# EAGLE board 2D_pcb (EAGLE 9.7.0)
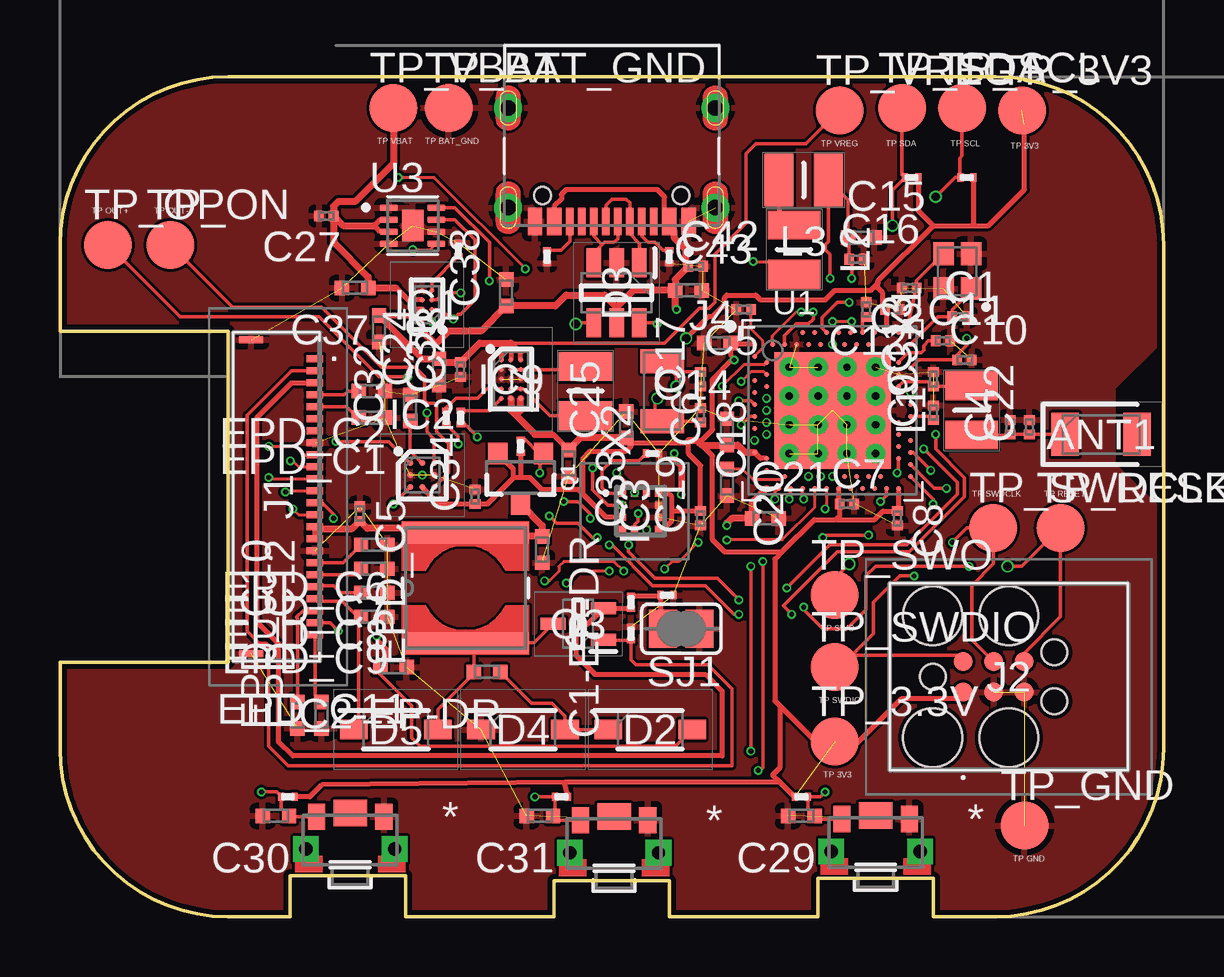
[diagram p0: board, top side]
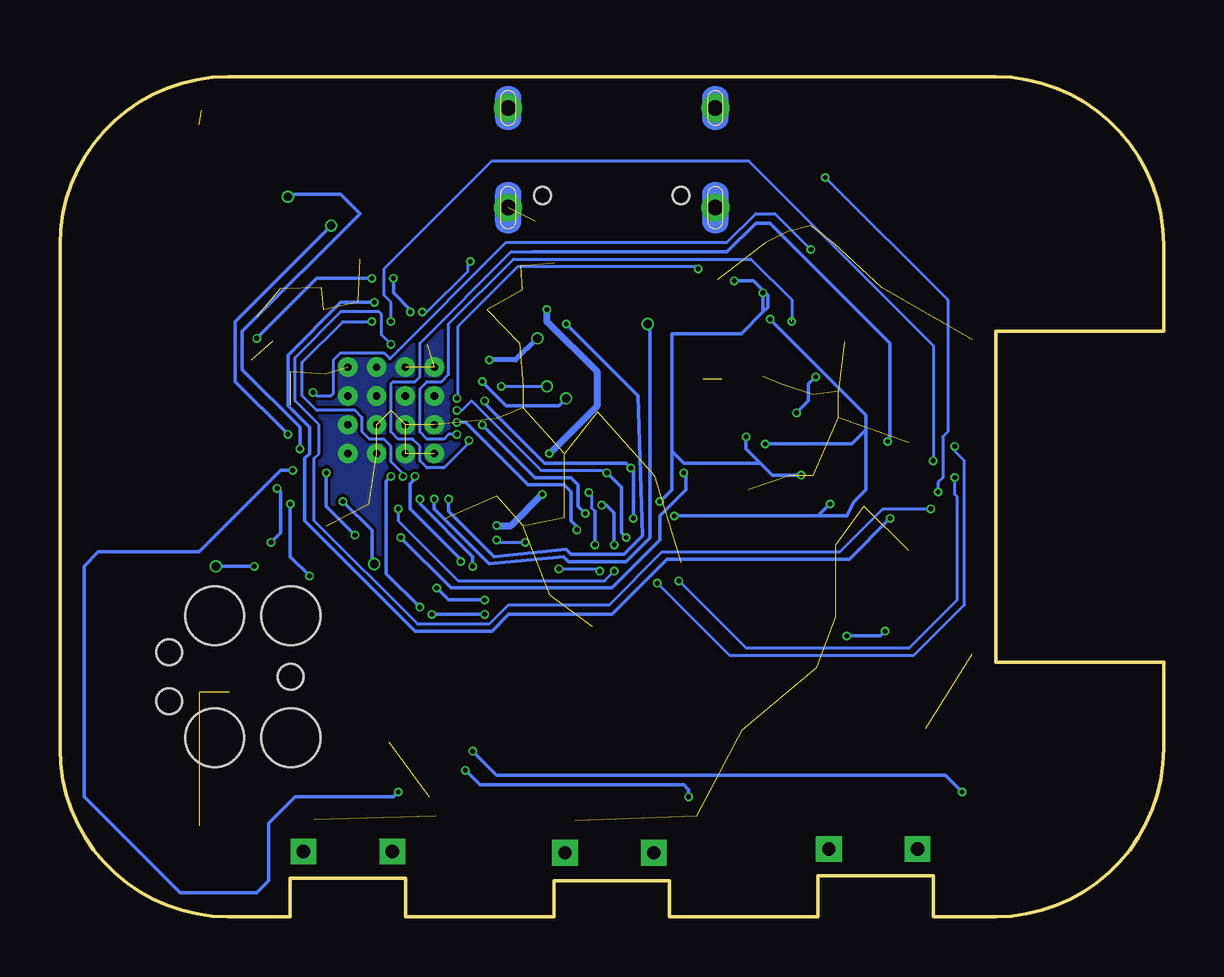
[diagram p1: board, bottom side, seen from below]

Size 46 x 35 mm. Coordinates in mm from the lower left corner, seen from the top.
Outline: 39,0 36.4,0 36.4,1.6 31.6,1.6 31.6,0 25.4,0 25.4,1.5 20.6,1.5 20.6,0 14.4,0 14.4,1.7 9.6,1.7 9.6,0 7,0 arc-90 0,7 0,10.6 7,10.6 7,24.4 0,24.4 0,28 arc-90 7,35 39,35 arc-90 46,28 46,7 arc-90 39,0
Copper layers (1+2*15+16): Top 0.035mm / dielectric 1.6mm / Route2 0.035mm / dielectric 0.15mm / Route15 0.035mm / dielectric 0.2mm / Bottom 0.035mm
Design rules "jlcpcb-2layers.dru *": minimum track width 5mil, minimum drill 0.15mm, track to track 5mil, track to pad 5mil, pad to pad 5mil, via to via 5mil, smd to smd 5mil, copper to edge 0.2mm, drill to drill 6mil, minimum pad ring 10mil, minimum via ring 3mil, stop-mask expansion 4mil, vias tented up to drill 999mm, thermal gap 10mil

## Footprints (pad centres in the part's own frame; a part is rotated, then mirrored left to right if it is on the bottom)
2450AT18B100E_ANTC3216X140N = smd 1.15 x 1.8: 1 -1.5,0; 2 1.5,0
NORDIC_NRF_3_RESC0201_N = smd 0.4 x 0.45: 1 -0.305,0; 2 0.305,0
NORDIC_NRF_3_RESC0402_N = smd 0.6 x 0.6: 1 -0.55,0; 2 0.55,0
ESP32_C6_LIBRARY_5_SOD3716X135N = smd 1.15 x 0.8: 1 -1.75,0; 2 1.75,0
ESP32_C6_LIBRARY_3_SOT95P280X145-6N = smd 1.2 x 0.6: 1 -1.25,0.95; 2 -1.25,0; 3 -1.25,-0.95; 4 1.25,-0.95; 5 1.25,0; 6 1.25,0.95
BQ25180YBGR_BGA8C40P2X4_100X155X50 = smd 0.2 x 0.2: A1 -0.2,0.6; A2 0.2,0.6; B1 -0.2,0.2; B2 0.2,0.2; C1 -0.2,-0.2; C2 0.2,-0.2; D1 -0.2,-0.6; D2 0.2,-0.6
DRV2605YZFR_BGA9C50P3X3_144X144X62 = smd 0.25 x 0.25: A1 -0.5,0.5; A2 0,0.5; A3 0.5,0.5; B1 -0.5,0; B2 0,0; B3 0.5,0; C1 -0.5,-0.5; C2 0,-0.5; C3 0.5,-0.5
BMA423_BMA423 = smd 0.3 x 0.35: 1 -0.75,-0.775; 2 -0.25,-0.775; 3 0.25,-0.775; 4 0.75,-0.775; 7 0.75,0.775; 8 0.25,0.775; 9 -0.25,0.775; 10 -0.75,0.775 | smd 0.35 x 0.3: 5 0.775,-0.25; 6 0.775,0.25; 11 -0.775,0.25; 12 -0.775,-0.25
RT6160AWSC_BGA15C40P3X5_140X230X60 = smd 0.216 x 0.216: A1 -0.4,0.8; A2 0,0.8; A3 0.4,0.8; B1 -0.4,0.4; B2 0,0.4; B3 0.4,0.4; C1 -0.4,0; C2 0,0; C3 0.4,0; D1 -0.4,-0.4; D2 0,-0.4; D3 0.4,-0.4; E1 -0.4,-0.8; E2 0,-0.8; E3 0.4,-0.8
503480-2400_5034802400 = smd 0.3 x 0.7: 1 -5.75,1.525; 2 -5.25,1.525; 3 -4.75,1.525; 4 -4.25,1.525; 5 -3.75,1.525; 6 -3.25,1.525; 7 -2.75,1.525; 8 -2.25,1.525; 9 -1.75,1.525; 10 -1.25,1.525; 11 -0.75,1.525; 12 -0.25,1.525; 13 0.25,1.525; 14 0.75,1.525; 15 1.25,1.525; 16 1.75,1.525; 17 2.25,1.525; 18 2.75,1.525; 19 3.25,1.525; 20 3.75,1.525; 21 4.25,1.525; 22 4.75,1.525; 23 5.25,1.525; 24 5.75,1.525 | smd 0.3 x 1: MP1 -6.54,-1.125; MP2 6.54,-1.125
TC2030-IDC_TC2030IDC = smd 0.783 x 0.783: 1 -0.953,-0.635; 2 -0.953,0.635; 3 0.317,-0.635; 4 0.317,0.635; 5 1.588,-0.635; 6 1.588,0.635 | hole 2.451: -2.223,-2.54; -2.223,2.54; 0.952,-2.54; 0.952,2.54 | hole 1.067: -2.223,0; 2.857,-1.016; 2.857,1.016
KH-TYPE-C-16P_KINGHELM_KH-TYPE-C-16P = smd 0.6 x 1.15: A1_B12 -3.2,4.725; A4_B9 -2.4,4.725; A9_B4 2.4,4.725; A12_B1 3.2,4.725 | smd 0.3 x 1.15: A5 -1.25,4.725; A6 -0.25,4.725; A7 0.25,4.725; A8 1.25,4.725; B5 1.75,4.725; B6 0.75,4.725; B7 -0.75,4.725; B8 -1.75,4.725 | drill 0.65 pad 1.05: SH1 -4.32,0; SH2 4.32,0; SH3 -4.32,4.15; SH4 4.32,4.15 | hole 0.7: -2.89,3.65; 2.89,3.65
MLP2016SR47MT0S1_INDC2016X100N = smd 1.2 x 2.2: 1 -1.028,0; 2 1.028,0
ESP32_C6_LIBRARY_2_IND_4828-WE-TPC_WRE = smd 0.9 x 5.3: 1 -2.286,0; 2 2.286,0
ESP32_C6_LIBRARY_4_ESP32_C6_LIBRARY_4_ESP32_C6_LIBRARY_4_ESP32_C6_LIBRARY_4_ESP32_WROVER_SPARKFUN-DISCRETESEMI_SOT23-3 = smd 0.8 x 0.9: 1 -0.95,-1; 2 0.95,-1; 3 0,1.1
ESP32_C6_LIBRARY_6_SOT65P210X110-3N = smd 1.05 x 0.5: 1 -1.05,0.65; 2 -1.05,-0.65; 3 1.05,0
CPF0201D7K68C1_0201 = smd 0.35 x 0.25: 1 0,0.275; 2 0,-0.275
ESP32_C6_LIBRARY_7_JUMPER_SJ = smd 1.168 x 1.6: 1 -0.762,0; 2 0.762,0
2025-10-22_07-23-44_LIBRARY_SW_EVP-AKE31A_PAN = smd 0.711 x 1.092: 1 -1.4,-0.972; 2 1.4,-0.972 | drill 0.559 pad 0.914 square: 3 -1.848,0.381; 4 1.848,0.381 | smd 1.397 x 1.092: 5 0,-1.124
HECTOR_WATCH_1_TP20R = smd 2 x 2: TP 0,0
NORDIC_NRF_4_AQFN50P700X700X85_HS-74N = smd 4.85 x 4.85: P$74 0,0 | drill 0.3 pad 0.6: P$75 -1.8,1.8; P$76 -0.6,1.8; P$77 0.6,1.8; P$78 1.8,1.8; P$79 -1.8,0.6; P$80 -0.6,0.6; P$81 0.6,0.6; P$82 1.8,0.6; P$83 -1.8,-0.6; P$84 -0.6,-0.6; P$85 0.6,-0.6; P$86 1.8,-0.6; P$87 -1.8,-1.8; P$88 -0.6,-1.8; P$89 0.6,-1.8; P$90 1.8,-1.8 | smd 0.2 x 0.2: P$A8 -1.25,3.25; P$A10 -0.75,3.25; P$A12 -0.25,3.25; P$A14 0.25,3.25; P$A16 0.75,3.25; P$A18 1.25,3.25; P$A20 1.75,3.25; P$A22 2.25,3.25; P$A23 2.75,3.25; P$AA24 3.25,-2.25; P$AB2 -2.75,-2.5; P$AC5 -2,-2.75; P$AC9 -1,-2.75; P$AC11 -0.5,-2.75; P$AC13 0,-2.75; P$AC15 0.5,-2.75; P$AC17 1,-2.75; P$AC19 1.5,-2.75; P$AC21 2,-2.75; P$AC24 3.25,-2.75; P$AD2 -2.75,-3.25; P$AD4 -2.25,-3.25; P$AD6 -1.75,-3.25; P$AD8 -1.25,-3.25; P$AD10 -0.75,-3.25; P$AD12 -0.25,-3.25; P$AD14 0.25,-3.25; P$AD16 0.75,-3.25; P$AD18 1.25,-3.25; P$AD20 1.75,-3.25; P$AD22 2.25,-3.25; P$AD23 2.75,-3.25; P$B1 -3.25,2.75; P$B3 -2.5,2.75; P$B5 -2,2.75; P$B7 -1.5,2.75; P$B9 -1,2.75; P$B11 -0.5,2.75; P$B13 0,2.75; P$B15 0.5,2.75; P$B17 1,2.75; P$B19 1.5,2.75; P$B24 3.25,2.75; P$C1 -3.25,2.25; P$D2 -2.75,2; P$D23 2.75,2; P$E24 3.25,1.75; P$F2 -2.75,1.5; P$F23 2.75,1.5; P$G1 -3.25,1.25; P$H2 -2.75,1; P$H23 2.75,1; P$J1 -3.25,0.75; P$J24 3.25,0.75; P$K2 -2.75,0.5; P$L1 -3.25,0.25; P$L24 3.25,0.25; P$M2 -2.75,0; P$N1 -3.25,-0.25; P$N24 3.25,-0.25; P$P2 -2.75,-0.5; P$P23 2.75,-0.5; P$R1 -3.25,-0.75; P$R24 3.25,-0.75; P$T2 -2.75,-1; P$T23 2.75,-1; P$U1 -3.25,-1.25; P$U24 3.25,-1.25; P$V23 2.75,-1.5; P$W1 -3.25,-1.75; P$W24 3.25,-1.75; P$Y2 -2.75,-2; P$Y23 2.75,-2
ESP32_C6_LIBRARY_SON50P200X200X80-9N = smd 0.76 x 0.27: 1 -0.985,0.75; 2 -0.985,0.25; 3 -0.985,-0.25; 4 -0.985,-0.75; 5 0.985,-0.75; 6 0.985,-0.25; 7 0.985,0.25; 8 0.985,0.75 | smd 0.9 x 1.3: 9 0,0
NORDIC_NRF_BT-XTAL_2016_N = smd 0.95 x 0.85: 1 -0.725,-0.575; 2 0.725,-0.575; 3 0.725,0.575; 4 -0.725,0.575
NORDIC_NRF_1_XTAL_3215_N = smd 1 x 1.8: 1 -1.25,0; 2 1.25,0

## Placement (x,y rotation side)
ANT1  2450AT18B100E  [2450AT18B100E_ANTC3216X140N]  43.4,20.1 0 top
C1  12pF  [NORDIC_NRF_3_RESC0201_N]  37.5,25 0 top
C1-EP-DR  10uF  [NORDIC_NRF_3_RESC0402_N]  20.1,15.3 270 top
C2  12pF  [NORDIC_NRF_3_RESC0201_N]  35.4,26.2 180 top
C2-EP-DR  4.7uF  [NORDIC_NRF_3_RESC0402_N]  17.8,10.2 180 top
C3  1pF  [NORDIC_NRF_3_RESC0201_N]  36.4,22.4 90 top
C4  1pF  [NORDIC_NRF_3_RESC0201_N]  39.6,20.4 90 top
C5  100nF  [NORDIC_NRF_3_RESC0201_N]  28.5,25.3 180 top
C6  4.7uF  [NORDIC_NRF_3_RESC0402_N]  27.8,20.2 90 top
C7  100nF  [NORDIC_NRF_3_RESC0201_N]  32.8,17.2 0 top
C8  100nF  [NORDIC_NRF_3_RESC0201_N]  34.9,16.6 270 top
C9  820pF N.C.  [NORDIC_NRF_3_RESC0201_N]  36.4,21 90 top
C10  N.C.  [NORDIC_NRF_3_RESC0201_N]  37.7,23.2 0 top
C11  100pF  [NORDIC_NRF_3_RESC0201_N]  36.8,24 0 top
C12  100nF  [NORDIC_NRF_3_RESC0201_N]  34.7,25.3 180 top
C13  N.C.  [NORDIC_NRF_3_RESC0201_N]  33.6,25.3 270 top
C14  4.7uF  [NORDIC_NRF_3_RESC0402_N]  27.4,23.9 180 top
C15  1.0uF  [NORDIC_NRF_3_RESC0402_N]  33.4,28.3 0 top
C16  47nF  [NORDIC_NRF_3_RESC0201_N]  33.2,27.4 0 top
C17  12pF  [NORDIC_NRF_3_RESC0201_N]  26.7,22.4 90 top
C18  12pF  [NORDIC_NRF_3_RESC0201_N]  26.7,20.9 270 top
C19  100nF  [NORDIC_NRF_3_RESC0201_N]  26.7,16.6 90 top
C20  4.7uF  [NORDIC_NRF_3_RESC0402_N]  27.8,18.1 270 top
C21  4.7uF  [NORDIC_NRF_3_RESC0402_N]  29.4,16.6 0 top
C22  N.C.  [NORDIC_NRF_3_RESC0201_N]  40.4,20.4 90 top
C23  0.1uF  [NORDIC_NRF_3_RESC0201_N]  16.7,22.8 90 top
C24  10uF  [NORDIC_NRF_3_RESC0402_N]  15.8,22.7 90 top
C25  22uF  [NORDIC_NRF_3_RESC0402_N]  23.6,20.5 90 top
C27  0.1uF  [NORDIC_NRF_3_RESC0201_N]  11.1,29.2 180 top
C29  1uF  [NORDIC_NRF_3_RESC0402_N]  30.9,4.2 180 top
C30  1uF  [NORDIC_NRF_3_RESC0402_N]  9,4.2 180 top
C31  1uF  [NORDIC_NRF_3_RESC0402_N]  20,4.2 180 top
C32  1uF  [NORDIC_NRF_3_RESC0402_N]  14.6,21.2 90 top
C33  22uF  [NORDIC_NRF_3_RESC0402_N]  21.2,18.9 270 top
C34  0.1uF  [NORDIC_NRF_3_RESC0201_N]  17.3,17.5 90 top
C37  1uF  [NORDIC_NRF_3_RESC0402_N]  12.3,26.2 180 top
C38  1uF  [NORDIC_NRF_3_RESC0402_N]  18.6,26 90 top
C39  10uF  [NORDIC_NRF_3_RESC0402_N]  13.3,24.5 270 top
C42  0.1uF  [NORDIC_NRF_3_RESC0201_N]  26.5,27.1 0 top
C43  4.7uF  [NORDIC_NRF_3_RESC0402_N]  26.2,26.1 0 top
D2  MBR0530  [ESP32_C6_LIBRARY_5_SOD3716X135N]  24.6,7.8 0 top
D3  USBLC6-2SC6Y  [ESP32_C6_LIBRARY_3_SOT95P280X145-6N]  23.2,26 270 top
D4  MBR0530  [ESP32_C6_LIBRARY_5_SOD3716X135N]  19.3,7.8 0 top
D5  MBR0530  [ESP32_C6_LIBRARY_5_SOD3716X135N]  14,7.8 0 top
EPD_C1  1uF  [NORDIC_NRF_3_RESC0402_N]  13,20.8 180 top
EPD_C2  1uF  [NORDIC_NRF_3_RESC0402_N]  13,21.9 180 top
EPD_C5  0.1uF  [NORDIC_NRF_3_RESC0201_N]  12.5,16.8 270 top
EPD_C6  1uF  [NORDIC_NRF_3_RESC0402_N]  13.1,15.5 180 top
EPD_C7  1uF  [NORDIC_NRF_3_RESC0402_N]  13.1,14.5 180 top
EPD_C8  1uF  [NORDIC_NRF_3_RESC0402_N]  13.1,13.5 180 top
EPD_C9  1uF  [NORDIC_NRF_3_RESC0402_N]  13.1,12.5 180 top
EPD_C10  1uF  [NORDIC_NRF_3_RESC0402_N]  9.9,8.4 90 top
EPD_C11  1uF  [NORDIC_NRF_3_RESC0402_N]  13.9,10.4 180 top
EPD_C12  1uF  [NORDIC_NRF_3_RESC0402_N]  10.9,8.4 90 top
IC1  BQ25180YBGR  [BQ25180YBGR_BGA8C40P2X4_100X155X50]  15.3,25.5 180 top
IC2  DRV2605YZFR  [DRV2605YZFR_BGA9C50P3X3_144X144X62]  15.1,18.4 0 top
IC3  BMA423  [BMA423_BMA423]  24.2,16.9 270 top
IC9  RT6160AWSC  [RT6160AWSC_BGA15C40P3X5_140X230X60]  18.8,22.4 0 top
J1  503480-2400  [503480-2400_5034802400]  9.1,17.5 270 top
J2  TC2030-IDC  [TC2030-IDC_TC2030IDC]  38.6,10 0 top
J4  KH-TYPE-C-16P  [KH-TYPE-C-16P_KINGHELM_KH-TYPE-C-16P]  23,33.7 180 top
L1  3.9nH  [MLP2016SR47MT0S1_INDC2016X100N]  38,21.1 270 top
L2  10uH  [MLP2016SR47MT0S1_INDC2016X100N]  30.6,27.8 90 top
L3  15nH  [MLP2016SR47MT0S1_INDC2016X100N]  31,30.7 0 top
L5  68uH  [ESP32_C6_LIBRARY_2_IND_4828-WE-TPC_WRE]  16.9,13.7 90 top
L7  FTC252012SR47MBCA  [MLP2016SR47MT0S1_INDC2016X100N]  21.9,21.9 270 top
Q1  20V/4.2A/52mΩ/1.4W  [ESP32_C6_LIBRARY_4_ESP32_C6_LIBRARY_4_ESP32_C6_LIBRARY_4_ESP32_C6_LIBRARY_4_ESP32_WROVER_SPARKFUN-DISCRETESEMI_SOT23-3]  19.2,18.3 180 top
Q3  SI1308EDL-T1-GE3  [ESP32_C6_LIBRARY_6_SOT65P210X110-3N]  21.6,12.2 180 top
R1_EP_DR  0.47  [CPF0201D7K68C1_0201]  23.8,13.1 0 top
R1_USB  5K1  [CPF0201D7K68C1_0201]  25.4,27.5 0 top
R2  0  [CPF0201D7K68C1_0201]  16.7,20.8 0 top
R2_EP_DR  10K  [CPF0201D7K68C1_0201]  23.8,11.8 0 top
R2_USB  5K1  [CPF0201D7K68C1_0201]  20.3,27.5 0 top
R3  0  [CPF0201D7K68C1_0201]  24.7,19.3 90 top
R4  0  [CPF0201D7K68C1_0201]  16.1,20.8 0 top
R5  10K  [CPF0201D7K68C1_0201]  9.5,5 90 top
R7  10K  [CPF0201D7K68C1_0201]  30.9,5 270 top
R8  10K  [CPF0201D7K68C1_0201]  20.9,5 90 top
R9  10K  [CPF0201D7K68C1_0201]  16.6,27.8 0 top
R17  3K3  [CPF0201D7K68C1_0201]  37.8,30.8 270 top
R18  3K3  [CPF0201D7K68C1_0201]  35.5,30.8 270 top
R_PWR_EPD  10K  [CPF0201D7K68C1_0201]  19.2,19.6 0 top
R_TYPE_SEL  2.2  [CPF0201D7K68C1_0201]  25.3,13.4 270 top
SJ1  [ESP32_C6_LIBRARY_7_JUMPER_SJ]  25.9,12 180 top
SW2  0  [2025-10-22_07-23-44_LIBRARY_SW_EVP-AKE31A_PAN]  34,3.1 180 top
SW3  0  [2025-10-22_07-23-44_LIBRARY_SW_EVP-AKE31A_PAN]  23.1,3.05 180 top
SW4  0  [2025-10-22_07-23-44_LIBRARY_SW_EVP-AKE31A_PAN]  12.1,3.2 180 top
TP_3.3V  HECTOR_WATCH_1_TPTP20R  [HECTOR_WATCH_1_TP20R]  32.3,7.3 0 top
TP_3V3  HECTOR_WATCH_1_TPTP20R  [HECTOR_WATCH_1_TP20R]  40.1,33.6 0 top
TP_BAT_GND  HECTOR_WATCH_1_TPTP20R  [HECTOR_WATCH_1_TP20R]  16.2,33.7 0 top
TP_GND  HECTOR_WATCH_1_TPTP20R  [HECTOR_WATCH_1_TP20R]  40.2,3.8 0 top
TP_ON  HECTOR_WATCH_1_TPTP20R  [HECTOR_WATCH_1_TP20R]  4.6,28 0 top
TP_OP  HECTOR_WATCH_1_TPTP20R  [HECTOR_WATCH_1_TP20R]  2,28 0 top
TP_RESET  HECTOR_WATCH_1_TPTP20R  [HECTOR_WATCH_1_TP20R]  41.7,16.2 0 top
TP_SCL  HECTOR_WATCH_1_TPTP20R  [HECTOR_WATCH_1_TP20R]  37.6,33.7 0 top
TP_SDA  HECTOR_WATCH_1_TPTP20R  [HECTOR_WATCH_1_TP20R]  35.1,33.7 0 top
TP_SWDCLK  HECTOR_WATCH_1_TPTP20R  [HECTOR_WATCH_1_TP20R]  38.9,16.2 0 top
TP_SWDIO  HECTOR_WATCH_1_TPTP20R  [HECTOR_WATCH_1_TP20R]  32.3,10.4 0 top
TP_SWO  HECTOR_WATCH_1_TPTP20R  [HECTOR_WATCH_1_TP20R]  32.3,13.4 0 top
TP_VBAT  HECTOR_WATCH_1_TPTP20R  [HECTOR_WATCH_1_TP20R]  13.9,33.7 0 top
TP_VREG  HECTOR_WATCH_1_TPTP20R  [HECTOR_WATCH_1_TP20R]  32.5,33.6 0 top
U1  NRF52840_QF  [NORDIC_NRF_4_AQFN50P700X700X85_HS-74N]  32.2,21.1 0 top
U3  MAX17048G+T10  [ESP32_C6_LIBRARY_SON50P200X200X80-9N]  14.7,28.8 0 top
X1  32MHz  [NORDIC_NRF_BT-XTAL_2016_N]  37.4,26.9 90 top
X2  32.768kHz  [NORDIC_NRF_1_XTAL_3215_N]  25.1,21.9 90 top

## Library data of the parts
ANT1 = InkTime_v5; ARROW_PART_NUMBER: 2450AT18B100E; ARROW_PRICE-STOCK: https://www.arrow.com/en/products/2450at18b100e/johanson-dielectrics?utm_currency=USD&region=nac; DESCRIPTION: Antennas 2.45GHz ANTENNA; HEIGHT: 1.4mm; MANUFACTURER_NAME: JOHANSON TECHNOLOGY; MANUFACTURER_PART_NUMBER: 2450AT18B100E; MOUSER_PART_NUMBER: 609-2450AT18B100E; MOUSER_PRICE-STOCK: https://www.mouser.co.uk/ProductDetail/Johanson-Technology/2450AT18B100E?qs=yCnrNFeXz%252Bh5MFsFIXGZGA%3D%3D
C1 C1-EP-DR C2 C2-EP-DR C3-C25 C27 C29-C34 C37-C39 C42 C43 EPD_C1 EPD_C2 EPD_C5-EPD_C12 R1_EP_DR R1_USB R2 R2_EP_DR R2_USB R3-R5 R7-R9 R17 R18 R_PWR_EPD R_TYPE_SEL SJ1 TP_3.3V TP_3V3 TP_BAT_GND TP_GND TP_ON TP_OP TP_RESET TP_SCL TP_SDA TP_SWDCLK TP_SWDIO TP_SWO TP_VBAT TP_VREG U1 X1 X2 = InkTime_v5
D2 D4 D5 = InkTime_v5; AVAILABILITY: In Stock; CHECK_PRICES: https://www.snapeda.com/parts/MBR0530/Onsemi/view-part/?ref=eda; DESCRIPTION: Diode Schottky 30 V 500mA Surface Mount SOD-123; MF: ON Semiconductor; MP: MBR0530; PACKAGE: SOD-123-2 ON Semiconductor; PRICE: None; PURCHASE-URL: https://www.snapeda.com/api/url_track_click_mouser/?unipart_id=179458&manufacturer=ON Semiconductor&part_name=MBR0530&search_term=None; SNAPEDA_LINK: https://www.snapeda.com/parts/MBR0530/Onsemi/view-part/?ref=snap
D3 = InkTime_v5; AVAILABILITY: In Stock; CHECK_PRICES: https://www.snapeda.com/parts/USBLC6-2SC6Y/STMicroelectronics/view-part/?ref=eda; DESCRIPTION: 17V Clamp 5A (8/20µs) Ipp Tvs Diode Surface Mount SOT-23-6; MF: STMicroelectronics; MP: USBLC6-2SC6Y; PACKAGE: SOT-23-6 STMicroelectronics; PRICE: None; SNAPEDA_LINK: https://www.snapeda.com/parts/USBLC6-2SC6Y/STMicroelectronics/view-part/?ref=snap
IC1 = InkTime_v5; ARROW_PART_NUMBER: BQ25180YBGR; ARROW_PRICE-STOCK: https://www.arrow.com/en/products/bq25180ybgr/texas-instruments?utm_currency=USD&region=nac; DESCRIPTION: Charger IC Lithium Ion/Polymer, Lithium Iron Phosphate 8-DSBGA (1.6x1.1); HEIGHT: 0.5mm; MANUFACTURER_NAME: Texas Instruments; MANUFACTURER_PART_NUMBER: BQ25180YBGR; MOUSER_PART_NUMBER: 595-BQ25180YBGR; MOUSER_PRICE-STOCK: https://www.mouser.co.uk/ProductDetail/Texas-Instruments/BQ25180YBGR?qs=doiCPypUmgEWjAK%252BJAX6Tw%3D%3D
IC2 = InkTime_v5; ARROW_PART_NUMBER: DRV2605YZFR; ARROW_PRICE-STOCK: https://www.arrow.com/en/products/drv2605yzfr/texas-instruments?region=nac; DESCRIPTION: Haptic Driver for ERM/LRA with Built-In Library and Smart Loop Architecture; HEIGHT: 0.625mm; MANUFACTURER_NAME: Texas Instruments; MANUFACTURER_PART_NUMBER: DRV2605YZFR
IC3 = InkTime_v5; ARROW_PART_NUMBER: BMA423; ARROW_PRICE-STOCK: https://www.arrow.com/en/products/bma423/bosch; DESCRIPTION: Accelerometers Triaxial low-g 12bit Acceleration Sensor; HEIGHT: 1mm; MANUFACTURER_NAME: BOSCH; MANUFACTURER_PART_NUMBER: BMA423; MOUSER_PART_NUMBER: 262-BMA423; MOUSER_PRICE-STOCK: https://www.mouser.co.uk/ProductDetail/Bosch-Sensortec/BMA423?qs=HXFqYaX1Q2xC%252BSgeGoX3mg%3D%3D
IC9 = InkTime_v5; DESCRIPTION: Buck-Boost Regulator Positive Output Step-Up/Step-Down I2C DC-DC Controller IC 15-WL-CSP (BSC) (1.4x2.3); HEIGHT: 0.6mm; MANUFACTURER_NAME: RICHTEK; MANUFACTURER_PART_NUMBER: RT6160AWSC; MOUSER_PART_NUMBER: 835-RT6160AWSC; MOUSER_PRICE-STOCK: https://www.mouser.co.uk/ProductDetail/Richtek/RT6160AWSC?qs=amGC7iS6iy%2FLd9PSoixZXQ%3D%3D
J1 = InkTime_v5; DESCRIPTION: FFC & FPC Connectors 0.5mm FPC RA SMT Dual Contact 24Ckt; HEIGHT: 1.87mm; MANUFACTURER_NAME: Molex; MANUFACTURER_PART_NUMBER: 503480-2400; MOUSER_PART_NUMBER: 538-503480-2400; MOUSER_PRICE-STOCK: https://www.mouser.co.uk/ProductDetail/Molex/503480-2400?qs=OAhjpuo3Vu7efIoxFh9AOw%3D%3D
J2 = InkTime_v5; DESCRIPTION: CABLE ADAPTER 6 POS; HEIGHT: 19mm; MANUFACTURER_NAME: Tag Connect; MANUFACTURER_PART_NUMBER: TC2030-IDC
J4 = InkTime_v5; AVAILABILITY: Not in stock; CHECK_PRICES: https://www.snapeda.com/parts/KH-TYPE-C-16P/Kinghelm/view-part/?ref=eda; MF: kinghelm; MP: KH-TYPE-C-16P; PACKAGE: None; PRICE: None; SNAPEDA_LINK: https://www.snapeda.com/parts/KH-TYPE-C-16P/Kinghelm/view-part/?ref=snap
L1-L3 L7 = InkTime_v5; DESCRIPTION: SMD / SMT Inductors (Coils), L=0.47?H, L x W x T :; HEIGHT: 1mm; JLCPCB: https://jlcpcb.com/partdetail/6763488-FTC252012SR47MBCA/C5832368; MANUFACTURER_NAME: TDK; MANUFACTURER_PART_NUMBER: FTC252012SR47MBCA
L5 = InkTime_v5; COPYRIGHT: Copyright (C) 2024 Ultra Librarian. All rights reserved.; MANUFACTURER_PART_NUMBER: 744043680; MFR_NAME: Wurth Electronics
Q1 = InkTime_v5; PROD_ID: TRAN-14388
Q3 = InkTime_v5; AVAILABILITY: In Stock; CHECK_PRICES: https://www.snapeda.com/parts/SI1308EDL-T1-GE3/Vishay+Siliconix/view-part/?ref=eda; DESCRIPTION: Si1308EDL-T1-GE3 N-channel MOSFET Transistor, 1.5 A, 30 V, 3-Pin SC-70 | Siliconix / Vishay SI1308EDL-T1-GE3; MF: Vishay Siliconix; MP: SI1308EDL-T1-GE3; PACKAGE: SOT-323 Vishay Semiconductor; PRICE: None; PURCHASE-URL: https://www.snapeda.com/api/url_track_click_mouser/?unipart_id=274603&manufacturer=Vishay Siliconix&part_name=SI1308EDL-T1-GE3&search_term=None; SNAPEDA_LINK: https://www.snapeda.com/parts/SI1308EDL-T1-GE3/Vishay+Siliconix/view-part/?ref=snap
SW2-SW4 = InkTime_v5; COPYRIGHT: Copyright (C) 2025 Ultra Librarian. All rights reserved.; DIGI-KEY_PART_NUMBER_1: P123437TR-ND; DIGI-KEY_PART_NUMBER_2: P123437CT-ND; DIGI-KEY_PART_NUMBER_3: P123437DKR-ND; MANUFACTURER_NAME: Panasonic; MANUFACTURER_PART_NUMBER: EVP-AKE31A
U3 = InkTime_v5; AVAILABILITY: In Stock; CHECK_PRICES: https://www.snapeda.com/parts/MAX17048G+T10/Analog+Devices/view-part/?ref=eda; DESCRIPTION: 3µA 1-Cell/2-Cell Fuel Gauge with ModelGauge; MF: Analog Devices; MP: MAX17048G+T10; PACKAGE: TDFN-8 Maxim; PRICE: None; PURCHASE-URL: https://www.snapeda.com/api/url_track_click_mouser/?unipart_id=329239&manufacturer=Analog Devices&part_name=MAX17048G+T10&search_term=None; SNAPEDA_LINK: https://www.snapeda.com/parts/MAX17048G+T10/Analog+Devices/view-part/?ref=snap

## Nets
3V3: C6.1 C7.1 C8.1 C12.2 C14.1 C19.2 C25.1 C33.1 C34.1 IC2.C2 IC3.3 IC3.7 IC3.10 IC9.E2 IC9.E3 J2.1 Q1.2 R5.2 R7.2 R8.2 R17.1 R18.1 R_PWR_EPD.2 TP_3.3V.TP TP_3V3.TP U1.P$A22 U1.P$AD14 U1.P$AD23 U1.P$B1 U1.P$W1 U1.P$Y2
ALERT: U1.P$J24 U3.5
D+: D3.4 U1.P$AD6
D-: D3.6 U1.P$AD4
DEC1: C5.1 U1.P$C1
DEC3: C11.1 U1.P$D23
DEC4_6: C10.1 C15.1 C16.1 L3.2 U1.P$B5 U1.P$E24
DN: D3.1 J4.A7 J4.B7
DP: D3.3 J4.A6 J4.B6
EPD_3V3: C1-EP-DR.1 EPD_C5.2 J1.15 J1.16 L5.2 Q1.3
EPD_BUSY: J1.9 U1.P$AD12
EPD_CS: J1.12 U1.P$K2
EPD_DC: J1.11 U1.P$AD10
EPD_RST: J1.10 U1.P$AC11
GDR: J1.2 Q3.1 R2_EP_DR.2
GND: C1-EP-DR.2 C1.2 C2.2 C3.2 C4.2 C5.2 C6.2 C7.2 C8.2 C9.2 C10.2 C11.2 C12.1 C13.1 C14.2 C15.2 C16.2 C17.1 C18.1 C19.1 C20.2 C21.2 C22.2 C23.1 C24.1 C25.2 C27.2 C29.2 C30.2 C31.2 C32.2 C33.2 C34.2 C37.2 C38.2 C39.2 C42.2 C43.2 D3.2 D4.1 EPD_C1.1 EPD_C2.1 EPD_C5.1 EPD_C6.1 EPD_C7.1 EPD_C8.1 EPD_C9.1 EPD_C10.1 EPD_C11.1 EPD_C12.1 IC1.D2 IC2.B1 IC2.B3 IC3.8 IC3.9 IC9.B1 IC9.C1 IC9.C2 IC9.C3 J1.8 J1.17 J1.MP1 J1.MP2 J2.3 J2.5 J4.A1_B12 J4.A12_B1 J4.SH1 J4.SH2 J4.SH3 J4.SH4 R1_USB.2 R2_EP_DR.1 R2_USB.2 R3.2 R9.1 R_TYPE_SEL.1 SJ1.1 SW2.1 SW3.1 SW4.1 TP_BAT_GND.TP TP_GND.TP U1.P$74 U1.P$75 U1.P$76 U1.P$77 U1.P$78 U1.P$79 U1.P$80 U1.P$81 U1.P$82 U1.P$83 U1.P$84 U1.P$85 U1.P$86 U1.P$87 U1.P$88 U1.P$89 U1.P$90 U1.P$B7 U1.P$F23 U3.1 U3.4 U3.6 U3.9 X1.2 X1.4
HAPTIC_EN: IC2.A1 U1.P$U1
IMU_INT1: IC3.5 U1.P$N1
IMU_INT2: IC3.6 U1.P$P2
LX1: IC9.B2 IC9.B3 L7.1
LX2: IC9.D2 IC9.D3 L7.2
MOSI: J1.14 U1.P$B13
N$1: IC1.D1 R9.2
N$2: IC9.D1 R4.1
N$3: IC9.E1 R2.1
N$4: IC3.1 R3.1
N$5: C20.1 U1.P$AC5
N$6: L2.1 U1.P$B3
N$7: L2.2 L3.1
N$8: C13.2 U1.P$A18
N$9: C2.1 U1.P$A23 X1.3
N$10: C1.1 U1.P$B24 X1.1
N$11: C3.1 L1.1 U1.P$H23
N$12: C9.1 U1.P$N24
N$13: C2-EP-DR.1 D2.1 D4.2
N$14: C2-EP-DR.2 D5.2 L5.1 Q3.3
N$15: R1_EP_DR.1 R_TYPE_SEL.2 SJ1.2
N$16: EPD_C1.2 J1.5
N$17: EPD_C2.2 J1.4
N$18: EPD_C6.2 J1.18
N$19: EPD_C7.2 J1.19
N$20: EPD_C8.2 J1.20
N$21: C32.1 IC2.A2
N$22: EPD_C10.2 J1.22
N$23: J4.B5 R2_USB.1
N$24: EPD_C12.2 J1.24
N$25: J4.A5 R1_USB.1
OUT+: IC2.A3 TP_OP.TP
OUT-: IC2.C3 TP_ON.TP
P0.00: C17.2 U1.P$D2 X2.2
P0.01: C18.2 U1.P$F2 X2.1
P0.04: U1.P$J1
P0.09: U1.P$L24
P0.13: C30.1 R5.1 SW4.2 U1.P$AD8
P0.14: C31.1 R8.1 SW3.2 U1.P$AC9
P0.19: U1.P$AC15
P0.20: U1.P$AD16
P0.21: U1.P$AC17
P0.22: U1.P$AD18
P0.23: U1.P$AC19
P0.24: U1.P$AD20
P0.25: U1.P$AC21
P0.26: U1.P$G1
P0.27: U1.P$H2
P0.28: U1.P$B11
P0.29: U1.P$A10
P0.30: U1.P$B9
P0.31: U1.P$A8
P1.01: Q1.1 R_PWR_EPD.1 U1.P$Y23
P1.02: C29.1 R7.1 SW2.2 U1.P$W24
P1.03: U1.P$V23
P1.04: U1.P$U24
P1.05: U1.P$T23
P1.06: U1.P$R24
P1.07: U1.P$P23
P1.09: U1.P$R1
P1.10: U1.P$A20
P1.11: U1.P$B19
P1.12: U1.P$B17
P1.13: U1.P$A16
P1.14: U1.P$B15
P1.15: U1.P$A14
PMIC_INT: IC1.A1 U1.P$T2
PREVGH: D5.1 EPD_C9.2 J1.21
PREVGL: D2.2 EPD_C11.2 J1.23
RESE: J1.3 Q3.2 R1_EP_DR.2
RESET: J2.6 TP_RESET.TP U1.P$AC13
RF: ANT1.1 C4.1 C22.1 L1.2
SCK: J1.13 U1.P$A12
SCL: IC1.B1 IC2.C1 IC3.12 R4.2 R17.2 TP_SCL.TP U1.P$M2 U3.7
SDA: IC1.C1 IC2.B2 IC3.2 R2.2 R18.2 TP_SDA.TP U1.P$L1 U3.8
SWDCLK: J2.4 TP_SWDCLK.TP U1.P$AA24
SWDIO: J2.2 TP_SWDIO.TP U1.P$AC24
SWO: TP_SWO.TP U1.P$AD22
VBAT: C27.1 C37.1 IC1.C2 TP_VBAT.TP U3.2 U3.3
VBUS: C21.1 C38.1 C42.1 C43.1 D3.5 IC1.A2 J4.A4_B9 J4.A9_B4 U1.P$AD2
VREG: C23.2 C24.2 C39.1 IC1.B2 IC9.A1 IC9.A2 IC9.A3 TP_VREG.TP

## Tracks (layer width: path | path; a pad name or v marks a point on that pad's centre or on a via)
3V3  (via drill 0.2, 0.35)  (2 unrouted)
  Top 0.2: C33.1 20.55,20.1 20.5,20.1 | U1.P$Y2 29.2,19.1 U1.P$W1 | 32.39,16.59 32.39,16.55 33.95,16.55 34.3,16.91 C8.1 34.95,16.95 U1.P$AD23 | 32.39,16.59 32.49,16.7 C7.1 32.45,17.26 U1.P$AD14 | 32.39,16.59 32.35,16.55 31.45,16.55 30.1,15.2 | 30.1,15.2 29.8,14.9 29.8,9 30,8.8 | 30.1,15.2 27.7,15.2 27.2,15.7 27.2,19.2 26.75,19.65 | U1.P$B1 27.91,23.85 C14.1 27.95,23.41 v28.1,23.2 28,23.2 27.2,22.4 27.2,20.3 26.65,19.75 | v26.1,24.1 27,25 27.2,25 27.7,25.5 27.7,25.8 27.8,25.9 29,25.9 29.2,25.7 31.9,25.7 32.3,26.1 33.8,26.1 34.1,26.4 | U1.P$A22 34.45,25.25 C12.2 34.3,25.39 34.3,26 34.1,26.2 34.1,26.4 | 34.1,26.4 34.1,26.5 36.4,28.8 | 36.4,28.8 38,28.8 | 38,28.8 38.7,28.8 40.2,30.3 40.2,33 | R17.1 38.08,28.88 38,28.8 | R18.1 35.77,29.43 36.4,28.8 | 26.2,19.85 26.2,19.75 26.2,19.3 26.7,18.8 C19.2 25.5,16.9 | IC3.7 25.15,16.15 25.5,16.5 25.5,16.9 | 25.5,16.9 25.5,17.5 25.35,17.65 IC3.10 | IC3.3 22.75,16.65 21.79,17.61 | 21.79,17.61 21.6,17.8 20.1,17.8 19.6,18.3 19.2,18.3 | 21.79,17.61 21.79,19.09 22.1,19.4 23.6,19.4 | 30,8.8 31.7,7.1 33.1,7.1 35.1,9.1 37.38,9.1 J2.1 | 19.2,18.3 18.9,18.3 | 18.9,18.3 17.8,17.2 C34.1 15.8,17.2 IC2.C2 | 18.9,18.3 18.9,18.65 Q1.2 | R_PWR_EPD.2 19.2,18.3 | 30,8.8 30,6.2 29.7,5.9 30,5.6 | 30,5.6 21.04,5.6 | R5.2 10.42,5 10.91,5.5 21.04,5.6 | R8.2 21.04,5.6 | R7.2 30.61,4.99 30,5.6
  Top 0.203: C25.1 23.8,19.75 | 23.8,19.75 23.8,19.6 23.6,19.4 | 23.8,19.75 26.2,19.75
  Top 0.3: IC9.E2 18.8,21.1 19,20.9 | 19,20.9 19.2,21.1 IC9.E3 | 19,20.9 19.8,20.1 20.5,20.1 | C25.1 21.7,19.95 C33.1 | 26.2,19.85 26.55,19.85 26.65,19.75 26.75,19.65 C6.1 28.25,19.65 28.55,19.35 U1.P$W1
  Bottom 0.2: v26.1,24.1 27,23.2 v28.1,23.2
ALERT  (via drill 0.2)
  Top 0.127: v14.7,27.8 15.43,27.8 U3.5
  Bottom 0.127: U1.P$J24 35.3,21.7 34.7,21.7 34.6,21.8 34.6,23.2 34.3,23.5 32.5,23.5 32.25,23.25 27.4,28.1 18.2,28.1 17,29.3 16.2,29.3 v14.7,27.8
  other vias: 35.45,21.85
D+  (via drill 0.2, 0.35)
  Top 0.15: D3.4 21.55,24.75 v21.5,24.7 | v30.4,17.4 30.45,17.45 U1.P$AD6
  Bottom 0.15: v21.5,24.7 21.4,24.6 21.4,15.8 22.4,14.8 24.8,14.8 25.01,15.01 28.11,14.71 30.4,17 v30.4,17.4
D-  (via drill 0.2)
  Top 0.15: D3.6 24.85,24.75 v24.9,24.7 | U1.P$AD4 29.8,17.7 v29.8,17.4
  Bottom 0.15: v24.9,24.7 21.9,21.7 21.72,15.88 22.5,15.1 24.7,15.1 24.91,15.31 27.91,15.01 29.8,16.9 v29.8,17.4
DEC1
  Top 0.127: U1.P$C1 29.3,23.7 29.3,24 28.8,24.5 C5.1
DEC3
  Top 0.15: U1.P$D23 35.35,23.5 35.9,23.5 36,23.6 36,23.8 36.2,24 C11.1
DEC4_6  (via drill 0.2)
  Top 0.15: U1.P$B5 30.2,24.2 30.7,24.7 31.2,24.7 31.4,24.9 v31.4,25.2 | U1.P$E24 35.8,23.2 C10.1 37.39,23.4 37.8,23.8 v37.8,24.1 | v32.1,26.6 32.1,27.6 31.9,27.8 31.9,28 32.03,28.13 L3.2 32.85,29.88 C15.1 32.89,28.26 C16.1 33,27.3 v33,26.6
  Bottom 0.15: v31.4,25.2 31.4,25.3 32.1,26 v32.1,26.6 | v37.8,24.1 35.3,26.6 v33,26.6
DN
  Top 0.15: J4.A7 22.75,29.65 23,29.9 23.6,29.9 23.75,29.75 J4.B7 23.75,28.45 24.15,28.05 D3.1
DP
  Top 0.15: J4.A6 23.25,28.25 23.1,28.1 22.7,28.1 22.6,28 | 22.6,28 22.25,27.65 D3.3 | J4.B6 22.25,28.35 22.6,28
EPD_3V3
  Top 0.2: J1.16 J1.15
  Top 0.3: Q1.3 20.1,16.3 C1-EP-DR.1 17.04,15.85 L5.2 16.7,16.19 12.81,16.19 EPD_C5.2 12.15,16.15 10.72,16.15 J1.15
EPD_BUSY  (via drill 0.2)
  Top 0.127: U1.P$AD12 31.95,17.05 v31.9,17 | v22.9,14.4 21.6,14.4 v21.1,13.9 | v8.7,19.6 9.8,19.6 10.15,19.25 J1.9
  Bottom 0.127: v31.9,17 31.9,16.5 29.4,14 23.3,14 v22.9,14.4 | v21.1,13.9 18.1,10.9 10.4,10.9 8.3,13 8.3,19 8.7,19.4 v8.7,19.6
EPD_CS  (via drill 0.2)
  Top 0.127: v19.4,27 15.6,30.8 v14.1,30.8 | v9.4,17.7 9.45,17.75 J1.12
  Bottom 0.127: U1.P$K2 29.4,21.65 29.4,24.6 26.9,27.1 19.4,27.1 v19.4,27 | v14.1,30.8 9,25.7 9,20.2 9.2,20 9.2,18.3 9.4,18.1 v9.4,17.7
  other vias: 29.45,21.6
EPD_DC  (via drill 0.2)
  Top 0.127: U1.P$AD10 31.45,17.05 30.1,15.7 v27.8,15.7 | v26.6,15.6 25.8,14.8 25.5,14.8 v25.2,14.5 | v23.5,14.4 23.1,14.8 21,14.8 20.8,14.6 20.8,14.4 20.4,14 v20.2,14 | v8.7,18.3 8.75,18.25 J1.11
  Bottom 0.127: v27.8,15.7 27.7,15.6 v26.6,15.6 | v25.2,14.5 23.6,14.5 v23.5,14.4 | v20.2,14 17.4,11.2 10.6,11.2 8.6,13.2 8.6,17.5 8.7,17.6 v8.7,18.3
EPD_RST  (via drill 0.2)
  Top 0.127: v33,24.8 v32.2,24.8 | v9.6,19 9.7,19 9.95,18.75 J1.10
  Bottom 0.127: U1.P$AC11 31.7,18.45 32.2,18.95 32.2,19.6 32.5,19.9 33.1,19.9 33.4,20.2 33.4,20.8 33.7,21.1 35.3,21.1 35.9,21.7 35.9,23.1 34.2,24.8 v33,24.8 | v32.2,24.8 32.2,25.6 32.5,25.9 32.5,27 28,31.5 17.3,31.5 9.6,23.8 v9.6,19
  other vias: 31.7,18.35
GDR
  Top 0.15: J1.2 9.65,22.75 7.8,20.9 7.8,11.9 8.3,11.4 8.6,11.4 8.7,11.3 8.7,7.1 9.5,6.3 28,6.3 28,9.5 27,10.5 24,10.5 23.8,10.7 R2_EP_DR.2 22.68,11.53 Q3.1
GND  (69 unrouted)
  pour Top: 43.92,18.84 43.9,18.88 43.9,22.02 43.92,22.06 45.8,23.94 45.8,31.56 40.86,36.5 -3.1,36.5 -3.1,3.94 1.34,-0.5 45.56,-0.5 45.8,-0.26 45.8,16.96
  pour Bottom: 45.7,31.36 41.56,35.5 -2.36,35.5 -2.8,35.06 -2.8,3.74 1.24,-0.3 45.56,-0.3 45.7,-0.16 45.7,17.06 44.36,18.4 40.88,18.4 40.84,18.42 40.72,18.54 40.7,18.58 40.7,21.62 40.72,21.66 40.94,21.88 40.98,21.9 43.9,21.9 43.9,22.12 43.92,22.16 45.7,23.94
HAPTIC_EN  (via drill 0.2)
  Top 0.15: v11.5,19.8 13.7,19.8 IC2.A1
  Bottom 0.127: U1.P$U1 28.95,19.75 30,18.7 30.7,18.7 31,19 31,19.6 31.3,19.9 31.9,19.9 32.2,20.2 32.2,22.2 32.1,22.3 31.2,22.3 31,22.5 31,23.9 27.2,27.7 26.3,27.7
  Bottom 0.15: 26.3,27.7 18.2,27.7 17,28.9 16.4,28.9 11.4,23.9 11.4,20 11.5,19.9 v11.5,19.8
  other vias: 28.95,19.85
IMU_INT1  (via drill 0.2)
  Top 0.15: U1.P$N1 28.75,20.85 v28.4,20.5 | v24.1,16.8 24.1,16.48 23.95,16.32 IC3.5
  Bottom 0.15: v28.4,20.5 26.2,18.3 24.7,18.3 24.4,18 24.4,17.1 v24.1,16.8
IMU_INT2  (via drill 0.2)
  Bottom 0.15: U1.P$P2 29.1,20.6 26.5,18 25,18 24.7,17.7 24.7,16.5 24.5,16.3 24.5,16.18 IC3.6
  other vias: 29.45,20.6 24.45,16.12
LX1
  Top 0.15: IC9.B2 IC9.B3 21.77,22.8 L7.1
LX2
  Top 0.15: IC9.D2 IC9.D3 19.3,22 20.43,20.87 L7.2
MOSI  (via drill 0.2)
  Top 0.127: v9.7,17 9.95,16.75 J1.14
  Bottom 0.127: v9.7,17 11.7,17 13.5,15.2 20.9,15.2 23.1,13 27.3,13 28.1,12.2 31.1,12.2 35.4,16.5 35.4,19.1 35.2,19.3 35.2,20.5 36.2,21.5 36.2,23.3 34.3,25.2 32.7,25.2 32.6,25.1 32.6,24.25 U1.P$B13
  other vias: 32.2,23.85
N$1
  Top 0.15: R9.2 15.5,26.43 IC1.D1
N$2
  Top 0.15: IC9.D1 17.8,22 17.4,21.6 16.5,21.6 16.1,21.2 R4.1
N$3
  Top 0.15: IC9.E1 17.88,21.07 R2.1
N$4
  Top 0.15: R3.1 24.12,19 23,19 22.6,18.6 22.6,17.88 22.82,17.65 IC3.1
N$5
  Top 0.127: U1.P$AC5 30.05,18.2 28.9,18.2 28.45,18.65 C20.1
N$6  (via drill 0.2)
  Top 0.127: U1.P$B3 29.7,24.2 30.7,25.2 v30.9,25.2 | v28.9,27.3 30.07,27.3 L2.1
  Bottom 0.127: v30.9,25.2 30.7,25.2 29,26.9 29,27.2 v28.9,27.3
N$7
  Top 0.15: L2.2 29.97,29.46 L3.1
N$8
  Top 0.15: U1.P$A18 33.45,24.84 C13.2
N$9
  Top 0.15: U1.P$A23 35.37,24.77 C2.1 35.7,26.51 X1.3
N$10
  Top 0.15: U1.P$B24 36.6,25 C1.1 37.2,25.3 37.98,26.07 X1.1
N$11
  Top 0.15: U1.P$H23 35.15,22.3 36.2,22.3 C3.1 37.97,22.09 L1.1
N$12
  Top 0.15: U1.P$N24 36.24,20.85 C9.1
N$13
  Top 0.15: C2-EP-DR.1 19.65,8.9 20.5,8.9 21.05,8.35 D4.2 D2.1
N$14
  Top 0.15: Q3.3 19.76,11.41 L5.1 17.25,11.06 C2-EP-DR.2 17.25,10.15 15.75,8.65 D5.2
N$15
  Top 0.2: R1_EP_DR.1 25,13.38 R_TYPE_SEL.2 25.02,12.11 SJ1.2
N$16
  Top 0.15: J1.5 11.95,21.25 12.4,20.8 EPD_C1.2
N$17
  Top 0.15: J1.4 11.85,21.75 12,21.9 EPD_C2.2
N$18
  Top 0.15: EPD_C6.2 11.8,14.75 J1.18
N$19
  Top 0.15: EPD_C7.2 12.3,14.25 J1.19
N$20
  Top 0.15: EPD_C8.2 11.7,13.5 11.4,13.8 10.68,13.8 J1.20
N$21
  Top 0.15: C32.1 14.6,19.4 IC2.A2
N$22
  Top 0.15: J1.22 10.12,12.75 9.87,12.5 9.9,12.4 EPD_C10.2
N$23
  Top 0.15: J4.B5 21.25,28.15 20.88,27.77 R2_USB.1
N$24
  Top 0.15: EPD_C12.2 10.62,9.22 J1.24
N$25
  Top 0.15: R1_USB.1 25.12,27.77 24.8,28.1 24.5,28.1 24.25,28.35 J4.A5
OUT+  (via drill 0.2)
  Top 0.15: IC2.A3 15.6,19.9 15.3,20.2 v15.3,21 | v14.5,22.5 13.3,22.5 10.8,25 5,25 TP_OP.TP
  Bottom 0.15: v15.3,21 14.8,21.5 14.8,22.2 v14.5,22.5
OUT-
  Top 0.15: IC2.C3 16.2,18.5 16.2,19.7 15.7,20.2 15.7,21.3 15.6,21.4 15.3,21.4 15.2,21.5 15.2,22.5 14.8,22.9 13.4,22.9 10.9,25.4 7.2,25.4 TP_ON.TP
P0.00  (via drill 0.2, 0.35)
  Top 0.127: U1.P$D2 29.35,23 28.5,23 v27.6,22.1
  Top 0.15: v25.7,22.1 25.7,22.55 X2.2 25.55,22.7 C17.2
  Bottom 0.127: v27.6,22.1 v25.7,22.1
P0.01  (via drill 0.2, 0.35)
  Top 0.127: v28.4,22.3 28.8,22.7 29.35,22.7 U1.P$F2
  Top 0.15: v24.9,21.6 24.8,21.5 24.8,20.95 X2.1 26.64,20.65 C18.2
  Bottom 0.15: v28.4,22.3 27.4,21.3 25.2,21.3 v24.9,21.6
P0.13  (via drill 0.2)
  Top 0.15: SW4.2 9.58,4.17 C30.1 9.22,4.53 R5.1 9.03,5.2 v8.4,5.2 | U1.P$AD8 30.95,17.45 v31,17.4 | v28.8,14.6 v28.8,6.9
  Bottom 0.15: v31,17.4 31,17.2 28.8,15 v28.8,14.6 | v28.8,6.9 27.8,5.9 9.1,5.9 v8.4,5.2
P0.14  (via drill 0.2)
  Top 0.15: SW3.2 20.73,4.02 C31.1 20.62,4.28 R8.1 v19.8,5 | v29.3,14.8 29.3,6.2 29.2,6.1 v29.1,6.1
  Bottom 0.15: U1.P$AC9 31.2,18.25 31.4,18.05 31.4,17 29.3,14.9 v29.3,14.8 | v29.1,6.1 28.5,5.5 20,5.5 19.8,5.3 v19.8,5
  other vias: 31.2,18.35
P1.01  (via drill 0.2)
  Top 0.15: R_PWR_EPD.1 19.4,19.88 19.98,19.3 20.1,19.3 | 20.1,19.3 Q1.1 | U1.P$Y23 34.95,18.65 34.9,18.6 v34.9,18.5 | v33.7,15.9 31.8,15.9 v31.8,15.8 | v20,18.5 20,19.2 20.1,19.3
  Bottom 0.15: v34.9,18.5 34.9,17.1 v33.7,15.9 | v31.8,15.8 29.7,13.7 23,13.7 21,15.7 21,16.7 19.9,17.8 19.9,18.4 v20,18.5
P1.02  (via drill 0.2)
  Top 0.15: SW2.2 31.58,4.07 C29.1 31.18,4.47 R7.1 31.7,5 v31.9,5.2 | U1.P$W24 35.55,19.35 v36.3,18.6
  Bottom 0.15: v36.3,18.6 36.8,18.6 40.2,15.2 44.4,15.2 45,14.6 45,5 41,1 37.8,1 37.3,1.5 37.3,3.9 36.2,5 32.1,5 v31.9,5.2
PMIC_INT  (via drill 0.2)  (1 unrouted)
  Bottom 0.127: U1.P$T2 29.8,20.1 30,19.9 30.7,19.9 31,20.2 31,22 30.7,22.3 30.1,22.3 29.8,22.6 29.8,24.7 27.1,27.4 17.2,27.4 15.5,25.7 v15.5,24.8
  other vias: 29.45,20.1
PREVGH
  Top 0.15: J1.21 10.72,13.15 11.75,13.15 12.4,12.5 EPD_C9.2 12.53,12.53 12.45,12.45 12.45,8 D5.1
PREVGL  (via drill 0.2)
  Top 0.15: D2.2 25.65,7.1 15,7.1 14.65,7.45 14.65,8.8 13.35,10.1 EPD_C11.2 13.65,10.7 13.65,11.15 13.2,11.6 v13.2,11.7 | v11.6,11.9 11.25,12.25 J1.23
  Bottom 0.15: v13.2,11.7 11.8,11.7 v11.6,11.9
RESE
  Top 0.2: R1_EP_DR.2 23.77,12.85 Q3.2 22,12.2 21.7,12.2 21.5,12 21.5,10.9 22.3,10.1 26.9,10.1 27.6,9.4 27.6,6.7 9.7,6.7 9.1,7.3 9.1,11.4 8.2,12.3 8.2,20.8 9.65,22.25 J1.3
RESET  (via drill 0.2, 0.35)
  Top 0.15: v31,12.9 31,12.8 31.8,12 32.8,12 33.6,12.8 33.6,14.2 34,14.6 v37.9,14.6 | v39.5,14.6 40.1,14.6 TP_RESET.TP 41.7,12.5 40.19,10.99 J2.6
  Bottom 0.15: U1.P$AC13 32.4,18.15 32.4,14.3 v31,12.9 | v37.9,14.6 v39.5,14.6
  other vias: 32.2,18.35
RF
  Top 0.15: L1.2 39.58,20.07 C4.1 C22.1 ANT1.1
SCK  (via drill 0.2)
  Top 0.15: U1.P$A12 31.75,24.55 31.75,24.95 32.4,25.6 v32.9,25.6 | v11.4,16.6 11.4,16.77 10.93,17.25 J1.13
  Bottom 0.15: v32.9,25.6 34.3,25.6 36.5,23.4 36.5,21.3 35.6,20.4 35.6,19.3 35.8,19.1 35.8,16.5 31.2,11.9 28,11.9 27.3,12.6 23,12.6 20.7,14.9 13.1,14.9 v11.4,16.6
SCL  (via drill 0.2, 0.35)
  Top 0.15: TP_SCL.TP 37.6,31.7 37.5,31.6 37.5,30.82 37.51,30.81 | 37.51,30.81 R17.2 | v23.2,18.5 23.95,17.75 v23.95,17.68 | v23.7,15.5 23.7,15.2 24.8,14.1 27.4,14.1 v28.3,13.2 | v30.3,13.7 32.1,15.5 35.3,15.5 37.4,17.6 37.4,18.1 v36,19.5 | v36.5,30 37.31,30.81 37.51,30.81 | IC1.B1 15.9,25.3 16.3,24.9 v16.4,24.9 16.6,25.1 16.7,25.1 17.3,25.7 17.3,28.2 16.45,29.05 U3.7 | v20.4,16.7 20.7,16.4 21.6,16.4 22.2,15.8 v22.4,15.8 | v13.9,17.2 IC2.C1 | R4.2 16.6,20.02 v16.6,19.7
  Bottom 0.127: v23.2,18.5 23.3,18.5 23.4,18.6 25.95,18.6 28.85,21.5 29.25,21.1 U1.P$M2 | 23.7,16.9 23.85,17.05 23.85,17.57 v23.95,17.68
  Bottom 0.15: 23.7,16.9 v23.7,15.5 | v30.3,13.7 29.8,13.2 v28.3,13.2 | v36,19.5 36,20.4 38.4,22.8 38.4,24.4 33.5,29.3 34.3,30.1 36.4,30.1 v36.5,30 | v16.4,24.9 12.4,20.9 12.4,20.3 | v20.4,16.7 14.4,16.7 | 14.4,16.7 13.2,16.7 12.9,17.3 12.4,17.8 12.4,20.3 | v22.4,15.8 22.6,16 22.6,17.9 v23.2,18.5 | 14.4,16.7 v13.9,17.2 | 12.4,20.3 13,19.7 v16.6,19.7
  other vias: 29.45,21.1
SDA  (via drill 0.2, 0.35)
  Top 0.15: TP_SDA.TP 35.1,30.93 R18.2 34.7,30.27 v34.7,28.8 | U1.P$L1 28.8,21.5 v28.3,21.5 | v22.2,18.7 22.2,17.8 22.85,17.15 IC3.2 | v22.9,15.5 23,15.5 24.7,13.8 26.9,13.8 28.1,12.6 v28.3,12.6 | v30.5,12.6 30.15,12.95 32.4,15.2 35.4,15.2 37.7,17.5 37.7,18.3 36.5,19.5 v36.5,20.1 | v16.7,26 16,26 15.7,25.7 IC1.C1 | v21,17.3 21.6,17.3 22.1,16.8 v22.1,16.6 | v17.4,20 16.88,20.52 R2.2 | v17.9,26.5 17.9,28.1 16.45,29.55 U3.8
  Bottom 0.15: v28.3,21.5 28.3,21.4 25.8,18.9 22.4,18.9 v22.2,18.7 22.1,18.6 v22.1,16.6 | v30.5,12.6 v28.3,12.6 | v34.7,28.8 38.7,24.8 38.7,22.3 v36.5,20.1 | 16.7,25.2 17.6,24.3 20.5,24.3 20.5,19.4 | v16.7,26 16.7,25.2 | 16.7,25.2 16.5,25.4 16.5,25.9 17.1,26.5 v17.9,26.5 | 20.5,19.4 20.5,17.8 v21,17.3 | 16.8,18.9 16.3,18.4 IC2.B2 | v17.4,20 17.4,19.5 16.8,18.9 | 16.8,18.9 20,18.9 20.5,19.4 | v22.9,15.5 22.9,16.82 23.23,17.15 IC3.2
  other vias: 15.1,18.4 23.43,17.15
SWDCLK  (via drill 0.2)
  Top 0.15: v36.95,17.85 36.45,17.85 U1.P$AA24 | v37.2,15.6 37.8,16.2 TP_SWDCLK.TP 38.9,14.7 38,13.8 38,11.55 J2.4
  Bottom 0.15: v36.95,17.85 36.8,17.7 36.8,16 v37.2,15.6
SWDIO  (via drill 0.2)
  Top 0.15: U1.P$AC24 36.4,17.4 v36.4,17.2 | v35.6,14.2 35,14.2 33.9,13.1 33.9,11.8 32.5,10.4 TP_SWDIO.TP 32.8,10.9 37.38,10.9 J2.2
  Bottom 0.15: v36.4,17.2 36.4,15 v35.6,14.2
SWO  (via drill 0.2, 0.35)
  Top 0.15: U1.P$AD22 34.45,17.55 v34.2,17.3 | v32.9,14.7 32.3,14.1 TP_SWO.TP
  Bottom 0.15: v34.2,17.3 33,16.1 33,14.8 v32.9,14.7
VBAT
  Top 0.2: U3.2 13.35,29.05 13.1,28.8 13.35,28.55 U3.3 | IC1.C2 14.5,25.7 14,26.2
  Top 0.3: TP_VBAT.TP 13.9,31.4 12.3,29.8 11.6,29.8 11.4,29.61 C27.1 | C27.1 11.8,28.8 13.1,28.8 | C27.1 11.4,28.09 12.85,26.65 C37.1 14,26.2
VBUS  (via drill 0.2)
  Top 0.2: J4.A4_B9 25.2,29.18 25.2,30 24.9,30.3 21.1,30.3 20.9,30.1 20.9,29.9 20.6,29.6 J4.A9_B4
  Top 0.203: 15.1,24.4 IC1.A2
  Top 0.3: 15.1,24.4 15.65,23.85 16.2,24.4 17.55,24.4 C38.1 20.65,25.45 21.1,25.9 22.7,25.9 23.2,25.4 | C42.1 26.07,26.98 | C42.1 25.65,26.55 C43.1 | U1.P$AD2 28.85,17.25 C21.1 28,16.6 27.8,16.4 v27.8,16.3 | C43.1 23.9,26.1 23.2,25.4 | 23.2,25.4 D3.5 | C42.1 26.1,27.2 26.1,27.8 25.6,28.3 25.6,28.57 25.4,28.77 J4.A4_B9 | v25.6,19.3 25.6,19.1 25.9,18.8 v25.9,17.6 | v25.7,25.3 25.65,25.35 C43.1
  Bottom 0.3: v27.8,16.3 27.2,16.3 v25.9,17.6 | v25.6,19.3 23.6,21.3 23.6,22.7 25.7,24.8 v25.7,25.3
VREG
  Top 0.15: TP_VREG.TP 31.1,32.2 29,32.2 28.6,31.8 28.6,28.9 27.3,27.6 27.3,25.6 27.05,25.35 26.65,25.35 25.2,23.9 18.8,23.9
  Top 0.2: IC9.A1 18.4,23.5 18.8,23.9 | 18.8,23.9 IC9.A2 | IC9.A3 19.2,23.5 18.8,23.9
  Top 0.254: IC1.B2 14.9,25.3 14.65,25.05 C39.1 15.1,23.25
  Top 0.3: 15.1,23.25 C24.2 15.95,23.11 C23.2 17.5,23.9 18.8,23.9
(copper drawn outside any net)
  shapes: Top area x2

## Text on the board
tPlace: TP VBAT | TP BAT_GND | TP VREG | TP SDA | TP SCL | TP 3V3 | TP OUT+ | TP OUT- | TP SWDCLK | TP RESET | TP SWO | TP SWDIO | TP 3V3 | TP GND